# Altium PCB VariableStroboscope_Rev1.0.PcbDoc
Units mm, origin at the board's own origin, x right, y up, seen from the top; angles counter-clockwise.
Board outline 152.4 x 101.6 mm, 2 copper layers (Top Layer, Bottom Layer); 12 components, 9 nets, 38 pads, 0 vias.
Unrouted connection lines stored in the file: 1.
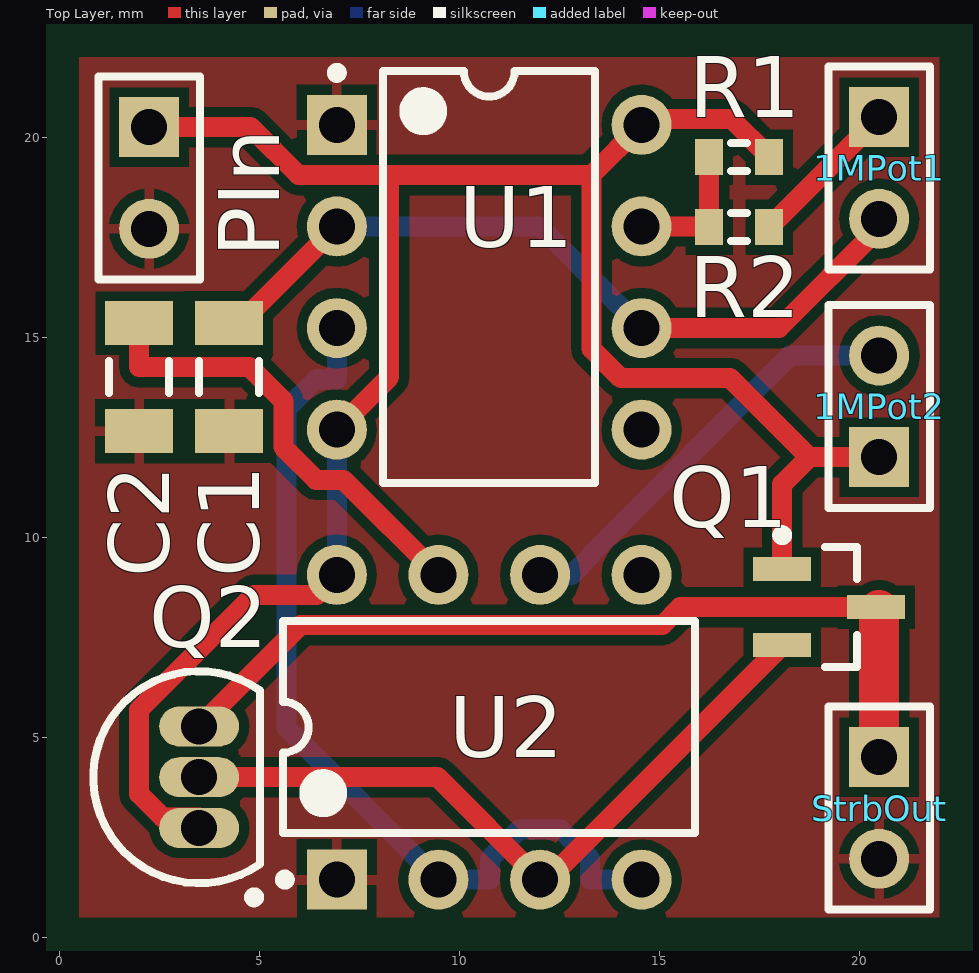
[diagram p0: Top Layer view]
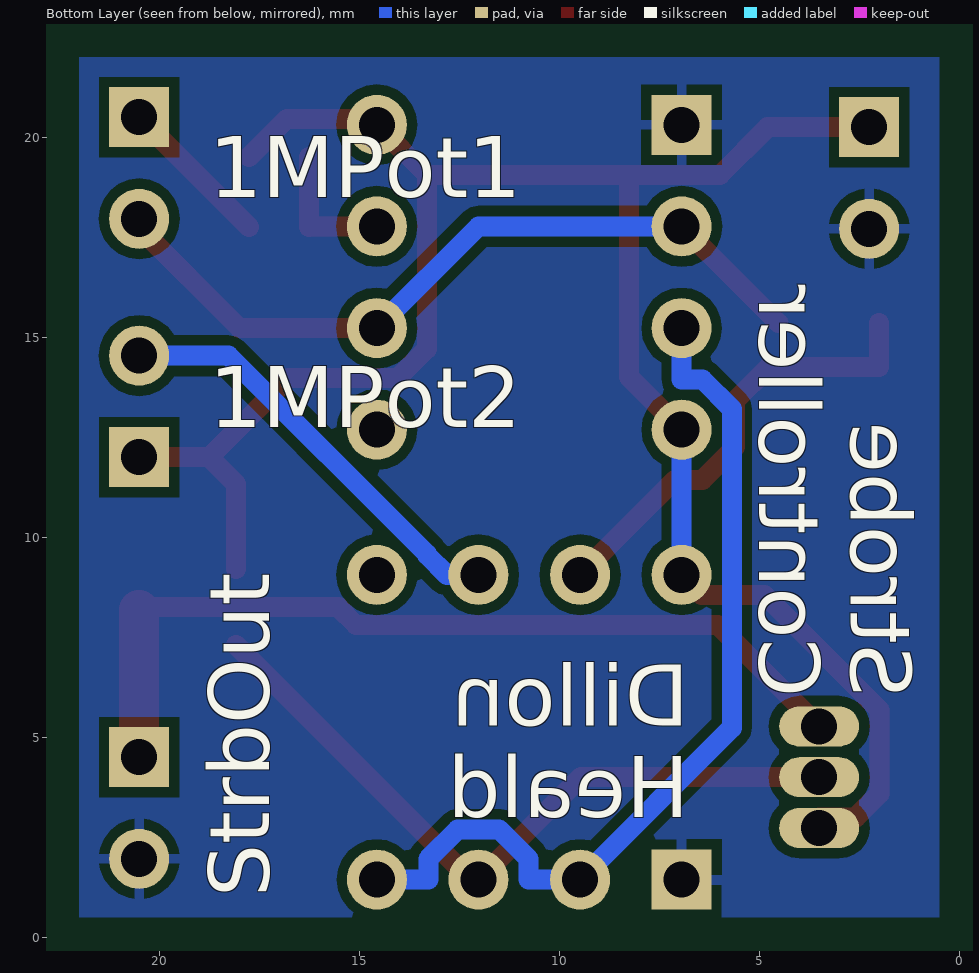
[diagram p1: Bottom Layer view, seen from below]

## Layer stack, top to bottom
Top Solder: solder mask 0.0102, Solder Resist, Dk 3.5
Top Layer: signal copper 0.0356
Dielectric 1: dielectric 0.32, FR-4, Dk 4.8
Bottom Layer: signal copper 0.0356
Bottom Solder: solder mask 0.0102, Solder Resist, Dk 3.5

## Board outline
-1.6,-1.6 150.8,-1.6 150.8,100 -1.6,100

## Design rules (kind name [scope] priority, off if disabled: settings)
Clearance [All] p1: gap=0.254
HoleSize [All] p1: absolutevalues=TRUE maxlimit=2.54 minlimit=0.254 maxpercent=80.000 minpercent=20.000
PolygonConnect [All] p1: connectstyle=Relief reliefconductorwidth=0.254 reliefentries=4 polygonreliefangle="90 Angle" airgapwidth=0.254
RoomDefinition VariableStoboscope_Rev1.0 [InComponentClass('VariableStoboscope_Rev1.0')] p1: confinementstyle=ConfineIn formatcopy=TRUE lockcomponents=FALSE outline 0.5,0.5 22,0.5 22,22 0.5,22
RoutingVias [All] p1: holewidth=0.711 width=1.27 viastyle="Through Hole" minholewidth=0.711 minwidth=1.27 maxholewidth=0.711 maxwidth=1.27
SolderMaskExpansion [All] p1: expansion=0.102
Width [All] p1: maxlimit=10 minlimit=0.5 preferedwidth=5
29 further rules are at their usual default settings.

## Components (designator, comment, footprint, x,y, rotation, side; value= is the part's Value field where it differs from the comment)
1MPot1 "PotExt1" HDR1X2 20.5,20.5 r270 top
1MPot2 "PotExt2" HDR1X2 20.5,12 r90 top
C1 "Cap Semi" C1206 4.25,14 r90 top
C2 "Cap Semi" C1206 2,14 r90 top
PIn "Header 2" HDR1X2 2.25,20.25 r270 top
Q1 "BD439_1" SOT-23B_M 19.25,8.25 r0 top
Q2 "BD439_2" TO-226-AA 3.5,4 r0 top
R1 "Res3" J1-0603 17,19.5 r0 top
R2 "Res3" J1-0603 17,17.75 r0 top
StrbOut "Header 2" HDR1X2 20.5,4.5 r270 top
U1 "LM555CN/NOPB" N08E 10.75,16.5 r0 top
U2 "LM555CN/NOPB" N08E 10.75,5.25 r90 top

## Footprints (in the part's own frame and the unit in brackets; to place one, negate y for a bottom-side part, rotate by r counter-clockwise, add the part's x,y. Pads: shape width x height; smd on the part's side, far side on the other; paste and mask are expansions set on the pad)
C1206 [mm] "Chip Capacitor, Body 3.2x1.6mm, IPC High Density"
  rect 1.1x1.7 smd: 1(-1.35,0) 2(1.35,0)
  silkscreen extent -0.4,-0.75 0.4,0.75, body extent -1.7,-0.9 1.7,0.9, height 1.3
HDR1X2 [mm] "Connector; Header; 2 Position"
  rect 1.5x1.5 hole 0.9: 1(0,0)
  round 1.5 hole 0.9: 2(2.54,0)
  silkscreen extent -1.27,-1.27 3.81,1.27
J1-0603 [mm] "Chip Resistor, Body 1.6x0.8mm, IPC High Density"
  rect 0.7x0.9 smd: 1(-0.75,0) 2(0.75,0)
  silkscreen extent -0.2,-0.35 0.2,0.35, body extent -0.85,-0.48 0.85,0.48, height 0.9
N08E [mm] "DIP, 8-Pin, Row Spacing 7.62 mm, Pitch 2.54 mm"
  rect 1.5x1.5 hole 0.9: 1(-3.81,3.81)
  round 1.5 hole 0.9: 2(-3.81,1.27) 3(-3.81,-1.27) 4(-3.81,-3.81) 5(3.81,-3.81) 6(3.81,-1.27) 7(3.81,1.27) 8(3.81,3.81)
  silkscreen extent -3.93,-5.15 2.65,5.23, body extent -3.6,-5.15 3.6,5.15, height 5.33
SOT-23B_M [mm] "SOT23, 3-Leads, Body 2.9x1.3mm, Pitch 0.95mm, Lead Span 2.4mm, IPC Low Density"
  rect 1.45x0.6 smd: 1(-1.175,0.95) 2(-1.175,-0.95) 3(1.175,0)
  silkscreen extent -1.3,-1.5 0.7,1.92, body extent -0.7,-1.5 0.7,1.5, height 1.14
TO-226-AA [mm] "TO, Flat Index; 3 In-Line, Axial Leads; Body Dia. 4.8mm; Leads 0.55 x 0.51 mm (max)"
  oval 2x1 hole 0.9: 1(0,-1.27) 2(0,0) 3(0,1.27)
  silkscreen extent -2.65,-3.13 1.52,2.65, body extent -2.65,-2.66 1.52,2.66, height 5.33

## Part data
1MPot1 1MPot2: library part "Header 2", "Header, 2-Pin"
C1 C2: "Capacitor (Semiconductor SIM Model)"
PIn StrbOut: "Header, 2-Pin"
Q1: library part QNPN, "NPN Bipolar Transistor"
Q2: library part NPN, "NPN Bipolar Transistor"
R1 R2: "Resistor"
U1 U2: library part CMP-0056-00016-2, "Timer, 8-pin MDIP, Pb-Free"

## Nets (pads, with @x,y where several pads share a name; then routed paths per layer and width w, separated by ;. In a path a pad name is that pad's centre, name@x,y a point inside that pad or via, vN(x,y) a via of type N, cw(c..) or ccw(c..) an arc to the next point about the centre after c; other vN are vias at no path point)
GND: C1.1 C2.1 PIn.2 StrbOut.2 U1.1 U2.1
Net1MPot1_1: 1MPot1.1 R2.2 | length 3.9
  Top Layer w0.5: R2.2 1MPot1.1
Net1MPot1_2: 1MPot1.2 C1.2 U1.2 U1.6 | length 19.3
  Top Layer w0.5: C1.2@4.52,15.35 U1.2 ; U1.6 17.993,15.23 20.5,17.737 1MPot1.2
  Bottom Layer w0.5: U1.2 12.02,17.77 U1.6
Net1MPot2_2: 1MPot2.2 C2.2 U2.6 U2.7 | length 22.2
  Top Layer w0.5: C2.2 2,14.25 4.763,14.25 5.604,13.409 5.604,12.253 6.421,11.436 7.104,11.436 U2.7
  Bottom Layer w0.5: U2.6 12.81,9.06 13.306,9.556 13.306,9.579 18.267,14.54 1MPot2.2
NetQ1_2: Q1.2 Q2.2 U2.3 | length 17.9
  Top Layer w0.5: Q2.2 9.46,4 U2.3 ; U2.3@12.215,1.44 Q1.2
NetQ1_3: Q1.3 Q2.3 StrbOut.1 | length 21.9
  Top Layer w0.5: Q2.3 6.036,7.806 15.079,7.806 15.523,8.25 Q1.3 Q1.3@20.5,8.175
  Top Layer w1: StrbOut.1 Q1.3@20.5,8.175
NetR1_1: R1.1 R2.1 U1.7 | length 3.4
  Top Layer w0.5: U1.7 16.23,17.77 R2.1 ; R2.1@16.25,17.79 R1.1
NetU1_3: U1.3 U2.2 U2.4 | length 22.9
  Bottom Layer w0.5: U1.3 6.94,13.944 6.421,13.944 5.686,13.209 5.686,5.234 U2.2 10.766,1.44 10.766,1.959 11.501,2.694 12.539,2.694 13.274,1.959 13.274,1.44 U2.4
VCC: 1MPot2.1 PIn.1 Q1.1 Q2.1 R1.2 U1.4 U1.8 U2.8 | length 53.5
  Top Layer w0.5: PIn.1 4.787,20.25 5.981,19.056 8.25,19.056 ; Q2.1 3.5,2.996 2.584,2.996 1.996,3.584 1.996,5.686 4.87,8.56 6.44,8.56 U2.8 ; U1.4 8.25,14 8.25,19.056 ; U1.8 13.306,19.056 ; U1.8@14.704,20.454 16.809,20.454 17.75,19.513 R1.2 ; Q1.1 18.075,11.325 18.75,12 ; 1MPot2.1 18.75,12 ; 8.25,19.056 13.306,19.056 ; 13.306,19.056 13.306,14.711 14.041,13.976 16.774,13.976 18.75,12
  Bottom Layer w0.5: U2.8 U1.4
pads on no net: U1.5 U2.5

## Polygon pours and split planes (outlines as drawn)
GND on Bottom Layer "Bottom Layer Pour" (solid, pour order 2): 0.5,0.5 22,0.5 22,22 0.5,22 0.5,0.5
GND on Top Layer "Top Layer Pour" (solid, pour order 0): 0.5,0.5 0.5,22 22,22 22,0.5 0.5,0.5

## Silkscreen, mask and mechanical layers (free items; w line width, h text height)
Bottom Overlay:
  text "Strobe  / Controller" at 5,6 h1.52 r90
  text "Dillon / Heald" at 6.75,3 h1.52
Mechanical 1:
  lines w0.254: 0,0 22.504,0 22.504,22.504 0,22.504 0,0